# Altium PCB DE-270124.PcbDoc
Units mil, origin at the board's own origin, x right, y up, seen from the top; angles counter-clockwise.
Board outline 5708.66 x 2559.06 mil, 2 copper layers (Top Layer, Bottom Layer); 41 components, 82 nets, 203 pads, 15 vias.
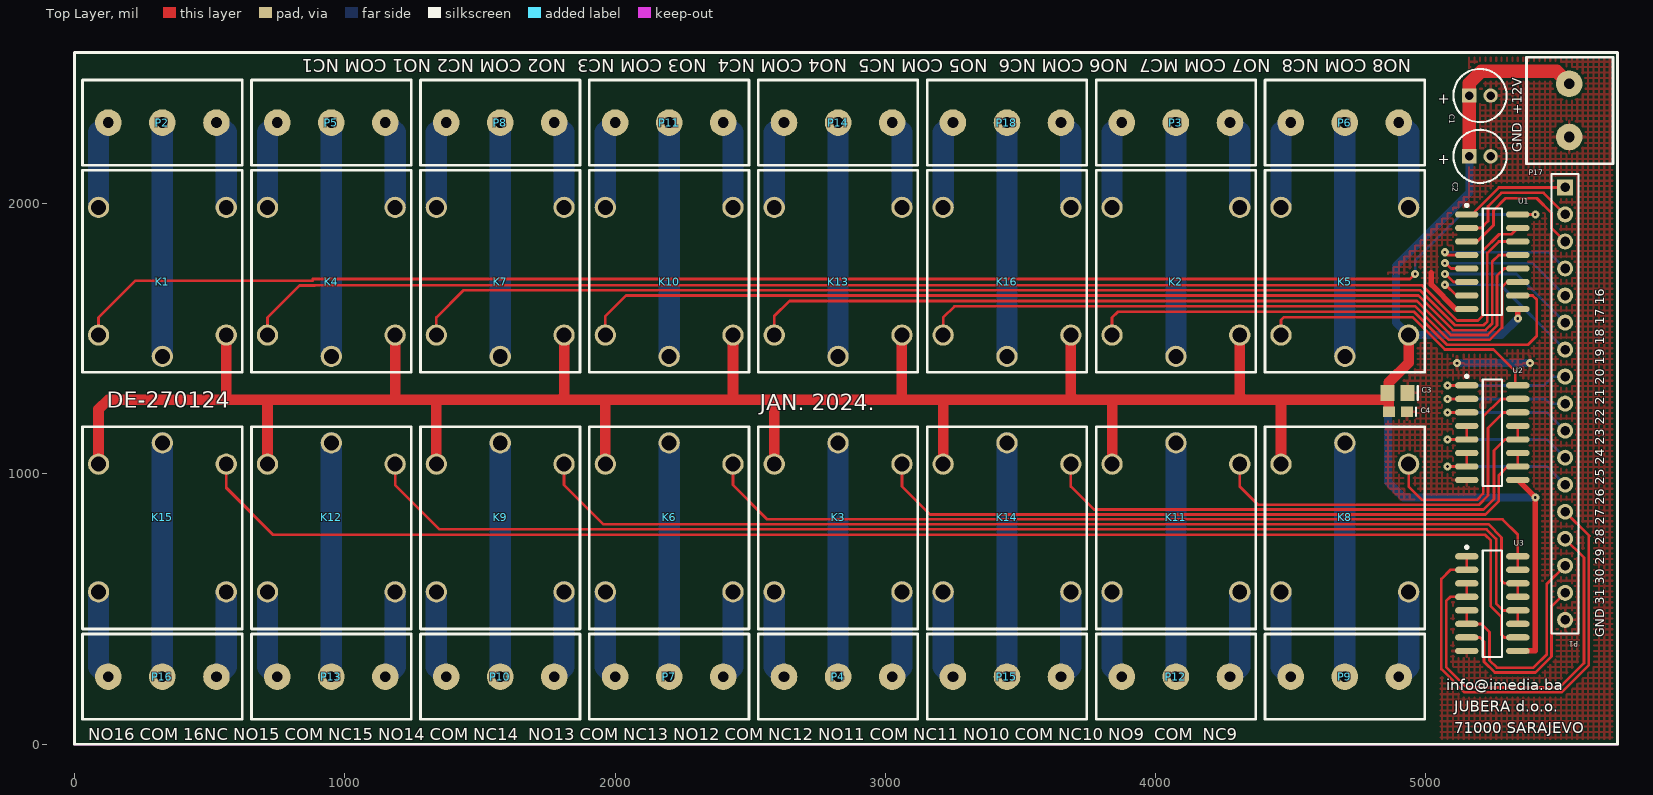
[diagram p0: Top Layer view]
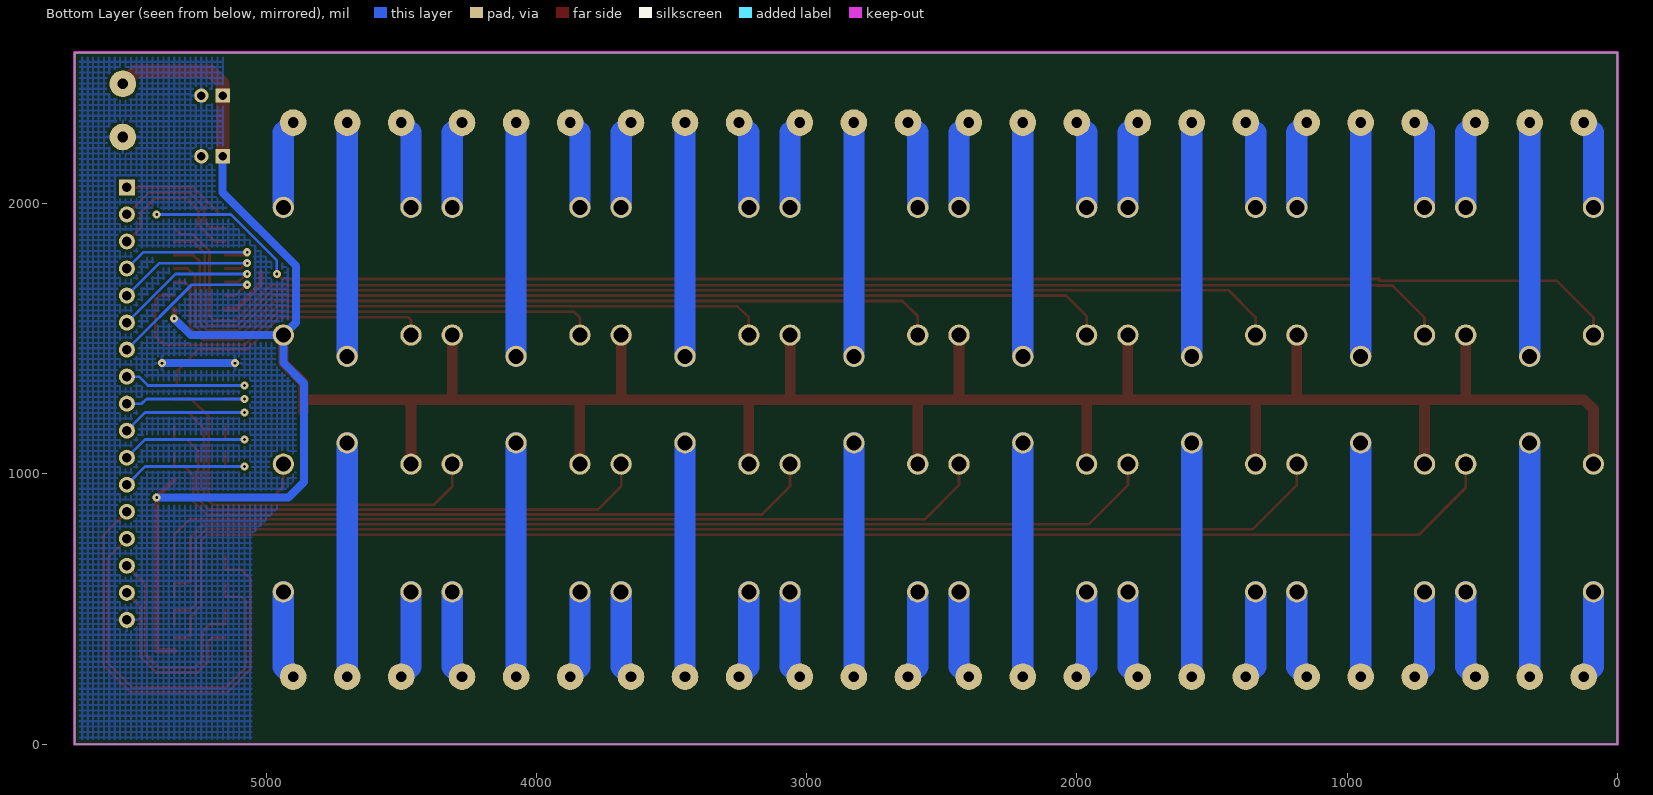
[diagram p1: Bottom Layer view, seen from below]

## Layer stack, top to bottom
Top Solder: solder mask 0.4, Solder Resist, Dk 3.5
Top Layer: signal copper 1.4
Dielectric 1: dielectric 12.6, FR-4, Dk 4.8
Bottom Layer: signal copper 1.4
Bottom Solder: solder mask 0.4, Solder Resist, Dk 3.5

## Board outline
0,0 0,2559.06 5708.66,2559.06 5708.66,0

## Design rules (kind name [scope] priority, off if disabled: settings)
Clearance [All] p1: gap=10 ignorepadtopadclearanceinfootprint=FALSE except(0: Arc-Hole Track-Hole SMDPad-Hole THPad-Hole Via-Hole Fill-Hole Poly-Hole Region-Hole Text-Hole; 8: Arc-Arc Arc-Track Track-Track)
PolygonConnect [All] p1: connectstyle=Relief reliefconductorwidth=10 reliefentries=4 polygonreliefangle="90 Angle" airgapwidth=10
RoutingVias [All] p1: holewidth=28 width=50 viastyle="Through Hole" minholewidth=28 minwidth=50 maxholewidth=28 maxwidth=50
SolderMaskExpansion [All] p1: expansion=4
Width [All] p1: maxlimit=196.85 minlimit=10 preferedwidth=10
30 further rules are at their usual default settings.

## Components (designator, comment, footprint, x,y, rotation, side; value= is the part's Value field where it differs from the comment)
C1 "22uF" CAPPR2-5X11 5200,2400 r0 top value=47uF
C2 "22uF" CAPPR2-5X11 5200,2175 r0 top value=47uF
C3 "10uF" 0805 4895,1300 r180 top
C4 "100nF" 0603 4896.54,1230 r180 top
K1 "SRD-12VDC" SRD-12VDC-SL-O 325,1750 r90 top
K2 "SRD-12VDC" SRD-12VDC-SL-O 4075,1750 r90 top
K3 "SRD-12VDC" SRD-12VDC-SL-O 2825,800 r270 top
K4 "SRD-12VDC" SRD-12VDC-SL-O 950,1750 r90 top
K5 "SRD-12VDC" SRD-12VDC-SL-O 4700,1750 r90 top
K6 "SRD-12VDC" SRD-12VDC-SL-O 2200,800 r270 top
K7 "SRD-12VDC" SRD-12VDC-SL-O 1575,1750 r90 top
K8 "SRD-12VDC" SRD-12VDC-SL-O 4700,800 r270 top
K9 "SRD-12VDC" SRD-12VDC-SL-O 1575,800 r270 top
K10 "SRD-12VDC" SRD-12VDC-SL-O 2200,1750 r90 top
K11 "SRD-12VDC" SRD-12VDC-SL-O 4075,800 r270 top
K12 "SRD-12VDC" SRD-12VDC-SL-O 950,800 r270 top
K13 "SRD-12VDC" SRD-12VDC-SL-O 2825,1750 r90 top
K14 "SRD-12VDC" SRD-12VDC-SL-O 3450,800 r270 top
K15 "SRD-12VDC" SRD-12VDC-SL-O 325,800 r270 top
K16 "SRD-12VDC" SRD-12VDC-SL-O 3450,1750 r90 top
P1 "Header 17" HDR1X17 5515,2060 r270 top
P2 "TERMINAL BLOK 3" "TERMINAL BLOK 3" 325,2300 r90 top
P3 "TERMINAL BLOK 3" "TERMINAL BLOK 3" 4075,2300 r90 top
P4 "TERMINAL BLOK 3" "TERMINAL BLOK 3" 2825,250 r270 top
P5 "TERMINAL BLOK 3" "TERMINAL BLOK 3" 950,2300 r90 top
P6 "TERMINAL BLOK 3" "TERMINAL BLOK 3" 4700,2300 r90 top
P7 "TERMINAL BLOK 3" "TERMINAL BLOK 3" 2200,250 r270 top
P8 "TERMINAL BLOK 3" "TERMINAL BLOK 3" 1575,2300 r90 top
P9 "TERMINAL BLOK 3" "TERMINAL BLOK 3" 4700,250 r270 top
P10 "TERMINAL BLOK 3" "TERMINAL BLOK 3" 1575,250 r270 top
P11 "TERMINAL BLOK 3" "TERMINAL BLOK 3" 2200,2300 r90 top
P12 "TERMINAL BLOK 3" "TERMINAL BLOK 3" 4075,250 r270 top
P13 "TERMINAL BLOK 3" "TERMINAL BLOK 3" 950,250 r270 top
P14 "TERMINAL BLOK 3" "TERMINAL BLOK 3" 2825,2300 r90 top
P15 "TERMINAL BLOK 3" "TERMINAL BLOK 3" 3450,250 r270 top
P16 "TERMINAL BLOK 3" "TERMINAL BLOK 3" 325,250 r270 top
P17 "TERMINAL BLOK 2" "TERMINAL BLOK 2" 5530,2345 r0 top
P18 "TERMINAL BLOK 3" "TERMINAL BLOK 3" 3450,2300 r90 top
U1 "ULN2003D" SO16_N 5245.51,1785 r0 top
U2 "ULN2003D" SO16_N 5245.51,1152.5 r0 top
U3 "ULN2003D" SO16_N 5245.51,520 r0 top

## Footprints (in the part's own frame and the unit in brackets; to place one, negate y for a bottom-side part, rotate by r counter-clockwise, add the part's x,y. Pads: shape width x height; smd on the part's side, far side on the other; paste and mask are expansions set on the pad)
0603 [mm] "Chip Capacitor; Body 1.6 x 0.8 mm (LxW typ)"
  rect 1.1x1 smd: 1(-0.85,0) 2(0.85,0)
  silkscreen extent -1.7,-0.4 -1.7,0.4
0805 [mm] "Chip Capacitor; Body 2.0 x 1.2 mm (LxW typ)"
  rect 1.3x1.5 smd: 1(-0.95,0) 2(0.95,0)
  silkscreen extent -1.9,-0.65 -1.9,0.65
CAPPR2-5X11 [mm] "Capacitor, Electrolytic, Radial; Body 5 x 11 mm (Dia.xH typ); Pin Spacing 2 mm (typ)"
  rect 1.35x1.35 hole 0.8: 1(-1,0)
  round 1.35 hole 0.8: 2(1,0)
  silkscreen extent -2.5,-2.5 2.5,2.5
HDR1X17 [mm] "Connector; Header; 17 Position"
  rect 1.5x1.5 hole 0.9: 1(0,0)
  round 1.5 hole 0.9: 2(2.54,0) 3(5.08,0) 4(7.62,0) 5(10.16,0) 6(12.7,0) 7(15.24,0) 8(17.78,0) 9(20.32,0) 10(22.86,0) 11(25.4,0) 12(27.94,0) 13(30.48,0) 14(33.02,0) 15(35.56,0) 16(38.1,0) 17(40.64,0)
  silkscreen extent -1.27,-1.27 41.91,1.27
SO16_N [mm] "SOIC, 16-Leads, Body 9.9x3.9mm, Pitch 1.27mm, IPC Medium Density"
  oval 2.2x0.6 smd: 1(-2.4,4.445) 2(-2.4,3.175) 3(-2.4,1.905) 4(-2.4,0.635) 5(-2.4,-0.635) 6(-2.4,-1.905) 7(-2.4,-3.175) 8(-2.4,-4.445) 9(2.4,-4.445) 10(2.4,-3.175) 11(2.4,-1.905) 12(2.4,-0.635) 13(2.4,0.635) 14(2.4,1.905) 15(2.4,3.175) 16(2.4,4.445)
  silkscreen extent -2.52,-5 0.9,5.42, body extent -1.95,-4.95 1.95,4.95, height 1.75
SRD-12VDC-SL-O [mm] "Print Relay 12Vdc NC-NO"
  round 2 hole 1.4: 1(-8,0) 2(-6,-6) 3(6,-6) 4(6,6) 5(-6,6)
  silkscreen extent -9.5,-7.5 9.5,7.5, body extent -9.4,-7.62 9.4,7.37, height 16
"TERMINAL BLOK 2" [mm] "2 pinski terminal blok konektor"
  round 2.5 hole 1: 1(0,-2.5) 2(0,2.5)
  silkscreen extent -4,-5 4.13,5
"TERMINAL BLOK 3" [mm] "3 pinski terminal blok konektor"
  round 2.5 hole 1: 1(0,5.08) 2(0,0) 3(0,-5.08)
  silkscreen extent -4,-7.5 4,7.5

## Part data
C1 C2: library part EKA00AA247F00, "Aluminum Electrolytic Capacitor, Radial Style with Long Leads: 47uF, 35V", ComponentLink1Description="Manufacturer Link", ComponentLink1URL=http://www.vishay.com/, ComponentLink2Description=Datasheet, ComponentLink2URL=http://www.vishay.com/docs/25014/eka.pdf, DatasheetDocument=20-Feb-2001, DrillSize="Nominal, Rounded To The Nearest 0.1mm", Note="Refer to Manufacturer's Data Sheets for other lead formations", PackageReference=CAPPR2-5X11, Published=19-Mar-2004, Publisher="Altium Limited"
C3: library part C0805, "Ceramic Chip Capacitor - Standard", PackageDocument=Mar-2001, Code_IPC=2012[0805], Code_JEITA=0805, ComponentLink1Description="Manufacturer Link", ComponentLink1URL=http://www.kemet.com/, ComponentLink2Description=Datasheet, ComponentLink2URL=http://www.kemet.com/kemet/web/homepage/kechome.nsf/vapubfilesname/F3102TA.pdf/$file/F3102TA.pdf, DatasheetDocument=Mar-2001, LatestRevisionDate=19-Mar-2004, LatestRevisionNote="Silkscreen size reduced.", Note="Footprint corresponds to dimensions for bulk cassette packaging. This case size has tightened tolerances.", PackageReference=0805, Published=17-Jul-2002, Publisher="Altium Limited"
C4: library part C0603, "Ceramic Chip Capacitor - Standard", PackageDocument=Mar-2001, Code_IPC="1608 [0603]", Code_JEITA=0603, ComponentLink1Description="Manufacturer Link", ComponentLink1URL=http://www.kemet.com/, ComponentLink2Description=Datasheet, ComponentLink2URL=http://www.kemet.com/kemet/web/homepage/kechome.nsf/vapubfilesname/F3102TA.pdf/$file/F3102TA.pdf, DatasheetDocument=Mar-2001, LatestRevisionDate=19-Mar-2004, LatestRevisionNote="Silkscreen size reduced.", Note="Footprint corresponds to dimensions for bulk cassette packaging. This case size has tightened tolerances.", PackageReference=0603, Published=17-Jul-2002, Publisher="Altium Limited"
K1 K2 K3 K4 K5 K6 K7 K8 K9 K10 K11 K12 K13 K14 K15 K16: library part SRD-12VDC-SL-O, "SPDT PCB relay 12Vc coil"
P1: "Header, 17-Pin", LatestRevisionDate=17-Jul-2002, LatestRevisionNote="Re-released for DXP Platform.", Publisher="Altium Limited"
P2 P3 P4 P5 P6 P7 P8 P9 P10 P11 P12 P13 P14 P15 P16 P18: "3 pinski terminal blok konektor"
P17: "2 pinski terminal blok"
U1 U2 U3: "Seven Darlington Array", Code_IPC=SOIC127P600-16, ComponentLink1Description="Manufacturer Link", ComponentLink1URL=http://www.st.com/, ComponentLink2Description=Datasheet, ComponentLink2URL=http://www.st.com/stonline/products/literature/ds/5279/uln2001.pdf, DatasheetVersion=Sep-1998, LatestRevisionDate=13-Apr-2006, LatestRevisionNote="IPC-7351 Footprint Added.", PackageDescription="16-Pin Small Outline Integrated Circuit 1.27 mm Pitch", PackageReference=SO16, PackageVersion=May-1998, Published=8-Jun-2000, Publisher="Altium Limited"

## Via types
v1: diameter 30, hole 10, Top Layer to Bottom Layer, 15 vias

## Nets (pads, with @x,y where several pads share a name; then routed paths per layer and width w, separated by ;. In a path a pad name is that pad's centre, name@x,y a point inside that pad or via, vN(x,y) a via of type N, cw(c..) or ccw(c..) an arc to the next point about the centre after c; other vN are vias at no path point)
NetK1_1: K1.1 P2.2 | length 865
  Bottom Layer w78.74: K1.1 P2.2
NetK1_3: K1.3 P2.3 | length 328.8
  Bottom Layer w78.74: P2.3 561.22,2263.78 K1.3
NetK1_4: K1.4 P2.1 | length 328.8
  Bottom Layer w78.74: K1.4 88.78,2263.78 P2.1
NetK2_1: K2.1 P3.2 | length 865
  Bottom Layer w78.74: K2.1 P3.2
NetK2_3: K2.3 P3.3 | length 328.8
  Bottom Layer w78.74: P3.3 4311.22,2263.78 K2.3
NetK2_4: K2.4 P3.1 | length 328.8
  Bottom Layer w78.74: K2.4 3838.78,2263.78 P3.1
NetK3_1: K3.1 P4.2 | length 865
  Bottom Layer w78.74: P4.2 K3.1
NetK3_3: K3.3 P4.3 | length 328.8
  Bottom Layer w78.74: K3.3 2588.78,286.22 P4.3
NetK3_4: K3.4 P4.1 | length 328.8
  Bottom Layer w78.74: P4.1 3061.22,286.22 K3.4
NetK4_1: K4.1 P5.2 | length 865
  Bottom Layer w78.74: K4.1 P5.2
NetK4_3: K4.3 P5.3 | length 328.8
  Bottom Layer w78.74: P5.3 1186.22,2263.78 K4.3
NetK4_4: K4.4 P5.1 | length 328.8
  Bottom Layer w78.74: K4.4 713.78,2263.78 P5.1
NetK5_1: K5.1 P6.2 | length 865
  Bottom Layer w78.74: K5.1 P6.2
NetK5_3: K5.3 P6.3 | length 328.8
  Bottom Layer w78.74: P6.3 4936.22,2263.78 K5.3
NetK5_4: K5.4 P6.1 | length 328.8
  Bottom Layer w78.74: K5.4 4463.78,2263.78 P6.1
NetK6_1: K6.1 P7.2 | length 865
  Bottom Layer w78.74: P7.2 K6.1
NetK6_3: K6.3 P7.3 | length 328.8
  Bottom Layer w78.74: K6.3 1963.78,286.22 P7.3
NetK6_4: K6.4 P7.1 | length 328.8
  Bottom Layer w78.74: P7.1 2436.22,286.22 K6.4
NetK7_1: K7.1 P8.2 | length 865
  Bottom Layer w78.74: K7.1 P8.2
NetK7_3: K7.3 P8.3 | length 328.8
  Bottom Layer w78.74: P8.3 1811.22,2263.78 K7.3
NetK7_4: K7.4 P8.1 | length 328.8
  Bottom Layer w78.74: K7.4 1338.78,2263.78 P8.1
NetK8_1: K8.1 P9.2 | length 865
  Bottom Layer w78.74: P9.2 K8.1
NetK8_3: K8.3 P9.3 | length 328.8
  Bottom Layer w78.74: K8.3 4463.78,286.22 P9.3
NetK8_4: K8.4 P9.1 | length 328.8
  Bottom Layer w78.74: P9.1 4936.22,286.22 K8.4
NetK9_1: K9.1 P10.2 | length 865
  Bottom Layer w78.74: P10.2 K9.1
NetK9_3: K9.3 P10.3 | length 328.8
  Bottom Layer w78.74: K9.3 1338.78,286.22 P10.3
NetK9_4: K9.4 P10.1 | length 328.8
  Bottom Layer w78.74: P10.1 1811.22,286.22 K9.4
NetK10_1: K10.1 P11.2 | length 865
  Bottom Layer w78.74: K10.1 P11.2
NetK10_3: K10.3 P11.3 | length 328.8
  Bottom Layer w78.74: P11.3 2436.22,2263.78 K10.3
NetK10_4: K10.4 P11.1 | length 328.8
  Bottom Layer w78.74: K10.4 1963.78,2263.78 P11.1
NetK11_1: K11.1 P12.2 | length 865
  Bottom Layer w78.74: P12.2 K11.1
NetK11_3: K11.3 P12.3 | length 328.8
  Bottom Layer w78.74: K11.3 3838.78,286.22 P12.3
NetK11_4: K11.4 P12.1 | length 328.8
  Bottom Layer w78.74: P12.1 4311.22,286.22 K11.4
NetK12_1: K12.1 P13.2 | length 865
  Bottom Layer w78.74: P13.2 K12.1
NetK12_3: K12.3 P13.3 | length 328.8
  Bottom Layer w78.74: K12.3 713.78,286.22 P13.3
NetK12_4: K12.4 P13.1 | length 328.8
  Bottom Layer w78.74: P13.1 1186.22,286.22 K12.4
NetK13_1: K13.1 P14.2 | length 865
  Bottom Layer w78.74: K13.1 P14.2
NetK13_3: K13.3 P14.3 | length 328.8
  Bottom Layer w78.74: P14.3 3061.22,2263.78 K13.3
NetK13_4: K13.4 P14.1 | length 328.8
  Bottom Layer w78.74: K13.4 2588.78,2263.78 P14.1
NetK14_1: K14.1 P15.2 | length 865
  Bottom Layer w78.74: P15.2 K14.1
NetK14_3: K14.3 P15.3 | length 328.8
  Bottom Layer w78.74: K14.3 3213.78,286.22 P15.3
NetK14_4: K14.4 P15.1 | length 328.8
  Bottom Layer w78.74: P15.1 3686.22,286.22 K14.4
NetK15_1: K15.1 P16.2 | length 865
  Bottom Layer w78.74: P16.2 K15.1
NetK15_3: K15.3 P16.3 | length 328.8
  Bottom Layer w78.74: K15.3 88.78,286.22 P16.3
NetK15_4: K15.4 P16.1 | length 328.8
  Bottom Layer w78.74: P16.1 561.22,286.22 K15.4
NetK16_1: K16.1 P18.2 | length 865
  Bottom Layer w78.74: K16.1 P18.2
NetK16_3: K16.3 P18.3 | length 328.8
  Bottom Layer w78.74: P18.3 3686.22,2263.78 K16.3
NetK16_4: K16.4 P18.1 | length 328.8
  Bottom Layer w78.74: K16.4 3213.78,2263.78 P18.1
NetP1_1: P1.1 U1.1 | length 405.4
  Top Layer w10: U1.1 5170,1960 5270,2060 P1.1
NetP1_2: P1.2 U1.2 | length 483.2
  Top Layer w10: U1.2 5205,1910 5230,1935 5230,1990 5280,2040 5435,2040 P1.2
NetP1_3: P1.3 U1.3 | length 561
  Top Layer w10: U1.3 5190,1860 5250,1920 5250,1975 5295,2020 5410,2020 5465,1965 5465,1910 P1.3
NetP1_4: P1.4 U1.4 | length 555
  Top Layer w10: v1(5070,1820) 5080,1810 U1.4
  Bottom Layer w10: v1(5070,1820) 5455,1820 P1.4
NetP1_5: P1.5 U1.5 | length 584
  Top Layer w10: v1(5070,1780) 5072.43,1780 5092.43,1760 U1.5
  Bottom Layer w10: v1(5070,1780) 5395,1780 P1.5
NetP1_6: P1.6 U1.6 | length 613
  Top Layer w10: v1(5070,1740) 5072.43,1740 5102.43,1710 U1.6
  Bottom Layer w10: v1(5070,1740) 5335,1740 P1.6
NetP1_7: P1.7 U1.7 | length 642
  Top Layer w10: v1(5070,1700) 5072.43,1700 5112.43,1660 U1.7
  Bottom Layer w10: v1(5070,1700) 5275,1700 P1.7
NetP1_8: P1.8 U2.1 | length 519.5
  Top Layer w10: v1(5080,1327.5) U2.1
  Bottom Layer w10: v1(5080,1327.5) 5437.5,1327.5 5470,1360 P1.8
NetP1_9: P1.9 U2.2 | length 513.3
  Top Layer w10: v1(5080,1277.5) U2.2
  Bottom Layer w10: v1(5080,1277.5) 5442.5,1277.5 5460,1260 P1.9
NetP1_10: P1.10 U2.3 | length 534
  Top Layer w10: v1(5080,1227.5) U2.3
  Bottom Layer w10: v1(5080,1227.5) 5447.5,1227.5 P1.10
NetP1_11: P1.11 U2.4 U2.5 | length 584
  Top Layer w10: v1(5080,1127.5) U2.5 U2.4
  Bottom Layer w10: v1(5080,1127.5) 5447.5,1127.5 P1.11
NetP1_12: P1.12 U2.6 U2.7 | length 584
  Top Layer w10: v1(5080,1027.5) U2.7 U2.6
  Bottom Layer w10: v1(5080,1027.5) 5447.5,1027.5 P1.12
NetP1_13: P1.13 U3.1 U3.2 | length 1720.8
  Top Layer w10: U3.1 U3.2 5090,645 5057,612 5057,277.54 5142.54,192 5502.46,192 5603,292.54 5603,768 5605,770 P1.13
NetP1_14: P1.14 U3.3 U3.4 | length 1444.6
  Top Layer w10: U3.3 U3.4 5090,545 5075,530 5075,285 5150,210 5495,210 5585,300 5585,690 P1.14
NetP1_15: P1.15 U3.5 U3.6 | length 850.5
  Top Layer w10: U3.5 U3.6 5205,445 5235,415 5235,310.46 5262.46,283 5397.54,283 5447,332.46 5447,592 P1.15
NetP1_16: P1.16 U3.7 | length 692.3
  Top Layer w10: U3.7 5200,395 5215,380 5215,305 5255,265 5405,265 5465,325 5465,510 P1.16
REL_0: K1.5 U1.16 | length 5636.9
  Top Layer w10: K1.5 88.78,1578.78 225,1715 881,1715 881,1721 4941,1721 v1(4960,1740) ; U1.16 v1(5405,1960)
  Bottom Layer w10: v1(4960,1740) 4960,1790 5130,1960 v1(5405,1960)
REL_1: K4.5 U1.15 | length 5077
  Top Layer w10: K4.5 713.78,1578.78 832,1697 888.46,1697 889.46,1698 4984.73,1698 5114.73,1568 5193,1568 5209.33,1584.33 5209.33,1824.79 5271.36,1886.81 5316.81,1886.81 U1.15
REL_2: K7.5 U1.14 | length 4439
  Top Layer w10: K7.5 1338.78,1578.78 1440,1680 4977.28,1680 5107.28,1550 5213.63,1550 5227.33,1563.7 5227.33,1817.33 5270,1860 U1.14
REL_3: K10.5 U1.13 | length 3780.2
  Top Layer w10: K10.5 1963.78,1583.78 2040,1660 4971.82,1660 5099.82,1532 5221.09,1532 5245.33,1556.24 5245.33,1785.33 5270,1810 U1.13
REL_4: K13.5 U1.12 | length 3106.7
  Top Layer w10: K13.5 2588.78,1583.78 2645,1640 4966.37,1640 5092.37,1514 5228.54,1514 5263.33,1548.79 5263.33,1733.33 5290,1760 U1.12
REL_5: K16.5 U1.11 | length 2436.2
  Top Layer w10: K16.5 3213.78,1578.78 3255,1620 4960.91,1620 5084.91,1496 5236,1496 5281.33,1541.33 5281.33,1691.33 5300,1710 U1.11
REL_6: K2.5 U1.10 | length 1920
  Top Layer w10: K2.5 3838.78,1578.78 3860,1600 4955.46,1600 5077.46,1478 5378,1478 5410,1510 5410,1645 5395,1660 U1.10
REL_7: K5.5 U2.16 | length 1058.7
  Top Layer w10: K5.5 4463.78,1568.78 4475,1580 4950,1580 5070,1460 5250,1460 5330,1380 U2.16@5330,1330
REL_8: K8.5 U2.15 | length 828.2
  Top Layer w10: K8.5 4936.22,953.78 4986,904 5188.54,904 5212,927.46 5212,1212 5277.5,1277.5 U2.15
REL_9: K11.5 U2.14 | length 1427.2
  Top Layer w10: K11.5 4311.22,953.78 4379,886 5196,886 5230,920 5230,1170 5287.5,1227.5 U2.14
REL_10: K14.5 U2.12 U2.13 | length 2034.4
  Top Layer w10: K14.5 3686.22,953.78 3772,868 5212.54,868 5252,907.46 5252,1087 5292.5,1127.5 U2.12 U2.13
REL_11: K3.5 U2.10 U2.11 | length 2583.4
  Top Layer w10: K3.5 3061.22,953.78 3165,850 5220,850 5270,900 5270,995 5302.5,1027.5 U2.10 U2.11
REL_12: K6.5 U3.15 U3.16 | length 3187.3
  Top Layer w10: K6.5 2436.22,958.78 2563,832 5283,832 5340,775 U3.16 U3.15
REL_13: K9.5 U3.13 U3.14 | length 3900.6
  Top Layer w10: K9.5 1811.22,958.78 1956,814 5231,814 5280,765 5280,605 5290,595 U3.14 U3.13
REL_14: K12.5 U3.11 U3.12 | length 4613.6
  Top Layer w10: K12.5 1186.22,958.78 1350,795 5224.54,795 5260,759.54 5260,520 5285,495 U3.12 U3.11
REL_15: K15.5 U3.10 | length 5276.7
  Top Layer w10: K15.5 561.22,948.78 735,775 5219.09,775 5240,754.09 5240,510 5280,470 5280,405 5290,395 U3.10
VCC: C1.1 C2.1 C3.2 C4.2 K1.2 K2.2 K3.2 K4.2 K5.2 K6.2 K7.2 K8.2 K9.2 K10.2 K11.2 K12.2 K13.2 K14.2 K15.2 K16.2 P17.2 U1.9 U2.9 U3.9 | length 12512.9
  Top Layer w20: U3.9 5405,345 v1(5405,912.5) U2.9 ; v1(5340,1575) U1.9
  Top Layer w39.37: K15.2 88.78,1238.78 125,1275 550,1275 ; K1.2 561.22,1286.22 550,1275 ; K12.2 713.78,1263.78 725,1275 ; K4.2 1186.22,1288.78 1200,1275 ; K9.2 1338.78,1263.78 1350,1275 ; K7.2 1811.22,1286.22 1800,1275 ; K6.2 1963.78,1263.78 1975,1275 ; K10.2 2436.22,1288.78 2450,1275 ; K3.2 2588.78,1263.78 2600,1275 ; K13.2 3061.22,1286.22 3050,1275 ; K14.2 3213.78,1263.78 3225,1275 ; K16.2 3686.22,1288.78 3700,1275 ; K11.2 3838.78,1263.78 3850,1275 ; K2.2 4311.22,1288.78 4325,1275 ; K8.2 4463.78,1263.78 4475,1275 ; C3.2@4855,1275 4475,1275 ; C4.2 4863.07,1338.07 4936.22,1411.22 K5.2 ; 550,1275 725,1275 ; 725,1275 1200,1275 ; 1200,1275 1350,1275 ; 1350,1275 1800,1275 ; 1800,1275 1975,1275 ; 1975,1275 2450,1275 ; 2450,1275 2600,1275 ; 2600,1275 3050,1275 ; 3050,1275 3225,1275 ; 3225,1275 3700,1275 ; 3700,1275 3850,1275 ; 3850,1275 4325,1275 ; 4325,1275 4475,1275
  Top Layer w50: C2.1 C1.1 5160.63,2445.63 5205,2490 5483.43,2490 P17.2
  Bottom Layer w30: C2.1 5160.63,2040.63 4890,1770 4890,1560 K5.2 ; v1(5340,1575) 5278.78,1513.78 K5.2 ; v1(5405,912.5) 4917.5,912.5 4860,970 4860,1335 4936.22,1411.22 K5.2
VSS: C1.2 C2.2 C3.1 C4.1 P1.17 P17.1 U1.8 U2.8 U3.8 | length 483.3
  Top Layer w20: 5020,1745 5020,1700 5110,1610 U1.8
  Bottom Layer w30: v1(5115,1410) v1(5385,1410)

## Polygon pours and split planes (outlines as drawn)
VSS on Top Layer "Bottom Layer-No Net" (hatched 90Degree grid 20 track 8, remove dead copper, pour order 0): 5160,2045 4850,1735 4850,960 5055,755 5055,0 5708.66,0 5708.66,2559.06 5160,2559.06
VSS on Bottom Layer "Bottom Layer-No Net" (hatched 90Degree grid 20 track 8, remove dead copper, pour order 2): 5160,2559.06 5708.66,2559.06 5708.66,0 5703.66,5 5055,5 5055,775 4865,965 4865,1760 5160,2055

## Keep-outs
Top Overlay:
  lines w10: 5708.66,0 5708.66,2559.06
Keep-Out Layer:
  the board outline again, w10

## Silkscreen, mask and mechanical layers (free items; w line width, h text height)
Top Overlay:
  lines w10: 5708.66,0 0,0 0,2559.06 5708.66,2559.06
  text "NO8 COM NC8  NO7 COM MC7  NO6 COM NC6  NO5 COM NC5  NO4 COM NC4  NO3 COM NC3  NO2 COM NC2 NO1 COM NC1" at 4945,2535 h48 r180
  text "GND  +12V" at 5355,2190 h35 r90
  text "DE-270124" at 120,1245 h60
  text "JAN. 2024." at 2535,1235 h60
  text "GND 31 30 29 28 27 26 25 24 23 22 21 20 19 18 17 16" at 5660,395 h34 r90
  text "info@imedia.ba" at 5075,200 h40
  text "JUBERA d.o.o." at 5105,120 h40
  text "71000 SARAJEVO" at 5105,40 h40
  text "NO16 COM 16NC NO15 COM NC15 NO14 COM NC14  NO13 COM NC13 NO12 COM NC12 NO11 COM NC11 NO10 COM NC10 NO9  COM  NC9" at 50,15 h45
Mechanical 15:
  the board outline again, w10

## Dimensions
0,2559.06 to 5708.66,2559.06 on Mechanical 13
5708.66,2559.06 to 5708.66,0 on Mechanical 13

## Text inside footprints (layer, text, board x,y; h text height)
C1: Top Overlay "+" at 5043.5,2370.47 h39.37
C2: Top Overlay "+" at 5043.5,2145.47 h39.37